# EAGLE board versmall.job (EAGLE 6.0)
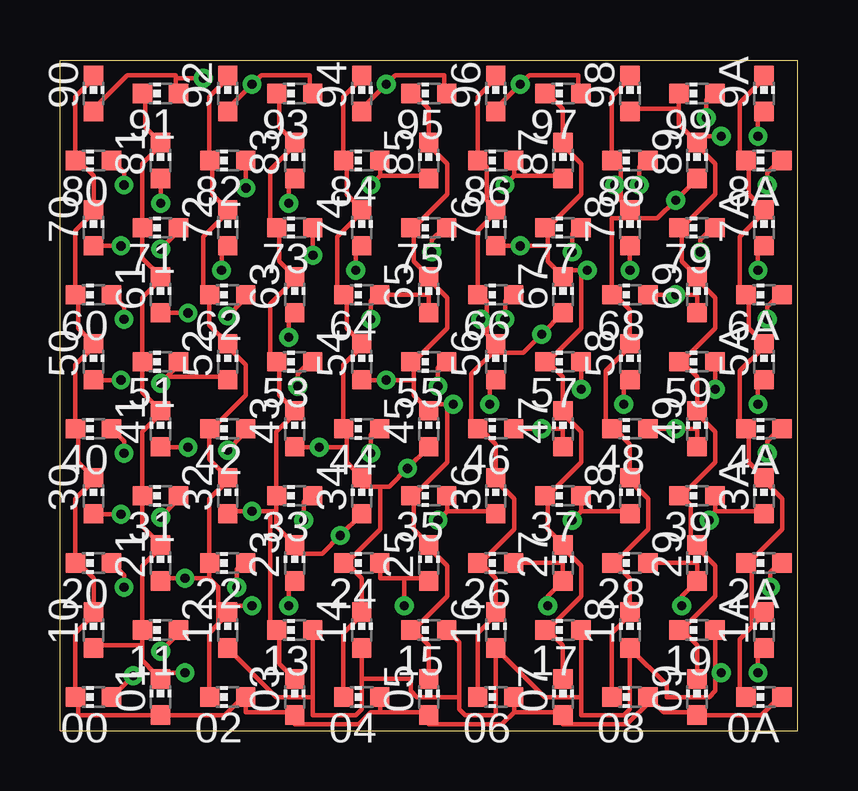
[diagram p0: board, top side]
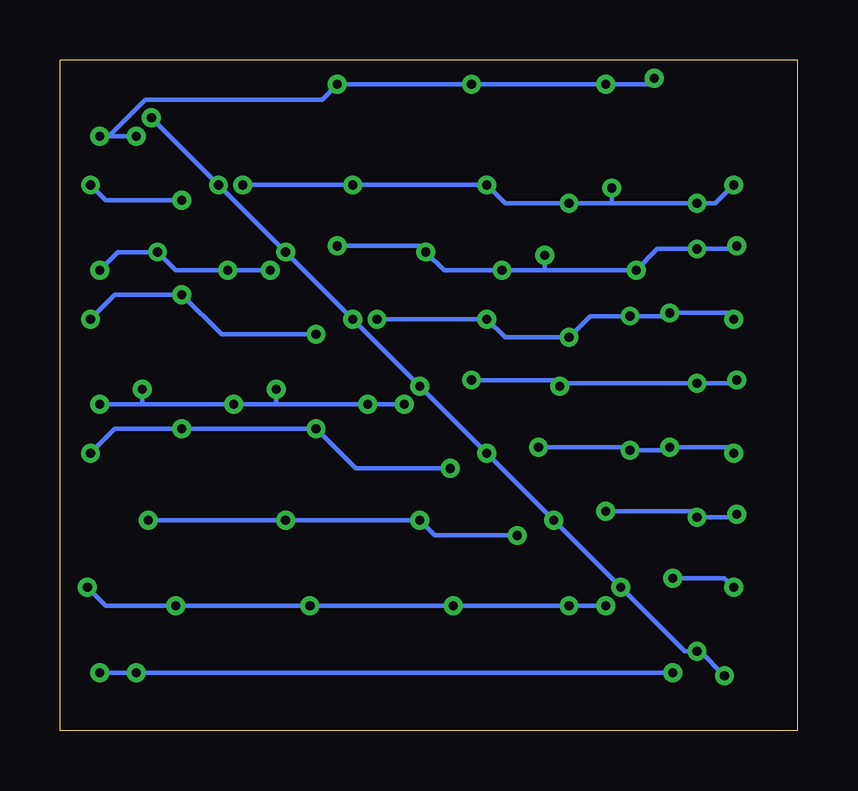
[diagram p1: board, bottom side, seen from below]

Size 30.73 x 27.94 mm. Coordinates in mm from the lower left corner, seen from the top.
Outline: 0,0 0,27.94 30.73,27.94 30.73,0 0,0
Copper layers (1*16): Top 0.035mm / dielectric 1.5mm / Bottom 0.035mm
Design rules: minimum track width 7mil, minimum drill 15mil, track to track 7mil, track to pad 7mil, pad to pad 7mil, via to via 7mil, smd to smd 7mil, copper to edge 0mil, drill to drill 7mil, minimum pad ring 10mil, minimum via ring 8mil, stop-mask expansion 4mil, vias tented up to drill 0mil, thermal gap 10mil

## Footprints (pad centres in the part's own frame; a part is rotated, then mirrored left to right if it is on the bottom)
CHIP-LED0603 = smd 0.8 x 0.8: A 0,-0.75; C 0,0.75

## Placement (x,y rotation side)
00  [CHIP-LED0603]  1.4,1.4 90 top
0A  [CHIP-LED0603]  29.34,1.4 90 top
01  [CHIP-LED0603]  4.19,1.4 0 top
1A  [CHIP-LED0603]  29.34,4.19 0 top
02  [CHIP-LED0603]  6.99,1.4 90 top
2A  [CHIP-LED0603]  29.34,6.99 90 top
03  [CHIP-LED0603]  9.78,1.4 0 top
3A  [CHIP-LED0603]  29.34,9.78 0 top
04  [CHIP-LED0603]  12.57,1.4 90 top
4A  [CHIP-LED0603]  29.34,12.57 90 top
05  [CHIP-LED0603]  15.37,1.4 0 top
5A  [CHIP-LED0603]  29.34,15.37 0 top
06  [CHIP-LED0603]  18.16,1.4 90 top
6A  [CHIP-LED0603]  29.34,18.16 90 top
07  [CHIP-LED0603]  20.95,1.4 0 top
7A  [CHIP-LED0603]  29.34,20.95 0 top
08  [CHIP-LED0603]  23.75,1.4 90 top
8A  [CHIP-LED0603]  29.34,23.75 90 top
09  [CHIP-LED0603]  26.54,1.4 0 top
9A  [CHIP-LED0603]  29.34,26.54 0 top
10  [CHIP-LED0603]  1.4,4.19 0 top
11  [CHIP-LED0603]  4.19,4.19 90 top
12  [CHIP-LED0603]  6.99,4.19 0 top
13  [CHIP-LED0603]  9.78,4.19 90 top
14  [CHIP-LED0603]  12.57,4.19 0 top
15  [CHIP-LED0603]  15.37,4.19 90 top
16  [CHIP-LED0603]  18.16,4.19 0 top
17  [CHIP-LED0603]  20.95,4.19 90 top
18  [CHIP-LED0603]  23.75,4.19 0 top
19  [CHIP-LED0603]  26.54,4.19 90 top
20  [CHIP-LED0603]  1.4,6.99 90 top
21  [CHIP-LED0603]  4.19,6.99 0 top
22  [CHIP-LED0603]  6.99,6.99 90 top
23  [CHIP-LED0603]  9.78,6.99 0 top
24  [CHIP-LED0603]  12.57,6.99 90 top
25  [CHIP-LED0603]  15.37,6.99 0 top
26  [CHIP-LED0603]  18.16,6.99 90 top
27  [CHIP-LED0603]  20.95,6.99 0 top
28  [CHIP-LED0603]  23.75,6.99 90 top
29  [CHIP-LED0603]  26.54,6.99 0 top
30  [CHIP-LED0603]  1.4,9.78 0 top
31  [CHIP-LED0603]  4.19,9.78 90 top
32  [CHIP-LED0603]  6.99,9.78 0 top
33  [CHIP-LED0603]  9.78,9.78 90 top
34  [CHIP-LED0603]  12.57,9.78 0 top
35  [CHIP-LED0603]  15.37,9.78 90 top
36  [CHIP-LED0603]  18.16,9.78 0 top
37  [CHIP-LED0603]  20.95,9.78 90 top
38  [CHIP-LED0603]  23.75,9.78 0 top
39  [CHIP-LED0603]  26.54,9.78 90 top
40  [CHIP-LED0603]  1.4,12.57 90 top
41  [CHIP-LED0603]  4.19,12.57 0 top
42  [CHIP-LED0603]  6.99,12.57 90 top
43  [CHIP-LED0603]  9.78,12.57 0 top
44  [CHIP-LED0603]  12.57,12.57 90 top
45  [CHIP-LED0603]  15.37,12.57 0 top
46  [CHIP-LED0603]  18.16,12.57 90 top
47  [CHIP-LED0603]  20.95,12.57 0 top
48  [CHIP-LED0603]  23.75,12.57 90 top
49  [CHIP-LED0603]  26.54,12.57 0 top
50  [CHIP-LED0603]  1.4,15.37 0 top
51  [CHIP-LED0603]  4.19,15.37 90 top
52  [CHIP-LED0603]  6.99,15.37 0 top
53  [CHIP-LED0603]  9.78,15.37 90 top
54  [CHIP-LED0603]  12.57,15.37 0 top
55  [CHIP-LED0603]  15.37,15.37 90 top
56  [CHIP-LED0603]  18.16,15.37 0 top
57  [CHIP-LED0603]  20.95,15.37 90 top
58  [CHIP-LED0603]  23.75,15.37 0 top
59  [CHIP-LED0603]  26.54,15.37 90 top
60  [CHIP-LED0603]  1.4,18.16 90 top
61  [CHIP-LED0603]  4.19,18.16 0 top
62  [CHIP-LED0603]  6.99,18.16 90 top
63  [CHIP-LED0603]  9.78,18.16 0 top
64  [CHIP-LED0603]  12.57,18.16 90 top
65  [CHIP-LED0603]  15.37,18.16 0 top
66  [CHIP-LED0603]  18.16,18.16 90 top
67  [CHIP-LED0603]  20.95,18.16 0 top
68  [CHIP-LED0603]  23.75,18.16 90 top
69  [CHIP-LED0603]  26.54,18.16 0 top
70  [CHIP-LED0603]  1.4,20.95 0 top
71  [CHIP-LED0603]  4.19,20.95 90 top
72  [CHIP-LED0603]  6.99,20.95 0 top
73  [CHIP-LED0603]  9.78,20.95 90 top
74  [CHIP-LED0603]  12.57,20.95 0 top
75  [CHIP-LED0603]  15.37,20.95 90 top
76  [CHIP-LED0603]  18.16,20.95 0 top
77  [CHIP-LED0603]  20.95,20.95 90 top
78  [CHIP-LED0603]  23.75,20.95 0 top
79  [CHIP-LED0603]  26.54,20.95 90 top
80  [CHIP-LED0603]  1.4,23.75 90 top
81  [CHIP-LED0603]  4.19,23.75 0 top
82  [CHIP-LED0603]  6.99,23.75 90 top
83  [CHIP-LED0603]  9.78,23.75 0 top
84  [CHIP-LED0603]  12.57,23.75 90 top
85  [CHIP-LED0603]  15.37,23.75 0 top
86  [CHIP-LED0603]  18.16,23.75 90 top
87  [CHIP-LED0603]  20.95,23.75 0 top
88  [CHIP-LED0603]  23.75,23.75 90 top
89  [CHIP-LED0603]  26.54,23.75 0 top
90  [CHIP-LED0603]  1.4,26.54 0 top
91  [CHIP-LED0603]  4.19,26.54 90 top
92  [CHIP-LED0603]  6.99,26.54 0 top
93  [CHIP-LED0603]  9.78,26.54 90 top
94  [CHIP-LED0603]  12.57,26.54 0 top
95  [CHIP-LED0603]  15.37,26.54 90 top
96  [CHIP-LED0603]  18.16,26.54 0 top
97  [CHIP-LED0603]  20.95,26.54 90 top
98  [CHIP-LED0603]  23.75,26.54 0 top
99  [CHIP-LED0603]  26.54,26.54 90 top

## Library data of the parts
00 0A 01 1A 02 2A 03 3A 04 4A 05 5A 06 6A 07 7A 08 8A 09 9A 10-99 = led

## Nets
D: 00.A 11.A 22.A 33.A 44.A 55.A 66.A 77.A 88.A 99.A
S0: 00.C 0A.A 01.A 02.A 03.A 04.A 05.A 06.A 07.A 08.A 09.A 10.C 20.C 30.C 40.C 50.C 60.C 70.C 80.C 90.C
S1: 01.C 1A.A 10.A 11.C 12.A 13.A 14.A 15.A 16.A 17.A 18.A 19.A 21.C 31.C 41.C 51.C 61.C 71.C 81.C 91.C
S2: 02.C 2A.A 12.C 20.A 21.A 22.C 23.A 24.A 25.A 26.A 27.A 28.A 29.A 32.C 42.C 52.C 62.C 72.C 82.C 92.C
S3: 03.C 3A.A 13.C 23.C 30.A 31.A 32.A 33.C 34.A 35.A 36.A 37.A 38.A 39.A 43.C 53.C 63.C 73.C 83.C 93.C
S4: 04.C 4A.A 14.C 24.C 34.C 40.A 41.A 42.A 43.A 44.C 45.A 46.A 47.A 48.A 49.A 54.C 64.C 74.C 84.C 94.C
S5: 05.C 5A.A 15.C 25.C 35.C 45.C 50.A 51.A 52.A 53.A 54.A 55.C 56.A 57.A 58.A 59.A 65.C 75.C 85.C 95.C
S6: 06.C 6A.A 16.C 26.C 36.C 46.C 56.C 60.A 61.A 62.A 63.A 64.A 65.A 66.C 67.A 68.A 69.A 76.C 86.C 96.C
S7: 07.C 7A.A 17.C 27.C 37.C 47.C 57.C 67.C 70.A 71.A 72.A 73.A 74.A 75.A 76.A 77.C 78.A 79.A 87.C 97.C
S8: 08.C 8A.A 18.C 28.C 38.C 48.C 58.C 68.C 78.C 80.A 81.A 82.A 83.A 84.A 85.A 86.A 87.A 88.C 89.A 98.C
S9: 09.C 9A.A 19.C 29.C 39.C 49.C 59.C 69.C 79.C 89.C 90.A 91.A 92.A 93.A 94.A 95.A 96.A 97.A 98.A 99.C
S10: 0A.C 1A.C 2A.C 3A.C 4A.C 5A.C 6A.C 7A.C 8A.C 9A.C

## Tracks (layer width: path | path; a pad name or v marks a point on that pad's centre or on a via)
D  (via drill 0.38)
  Top 0.178: v3.05,2.29 00.A | v4.19,3.3 4.83,3.94 4.83,4.19 11.A | v7.37,5.97 7.37,6.73 7.62,6.99 22.A | v10.16,8.76 10.16,9.53 10.41,9.78 33.A | v12.95,11.56 12.95,12.32 13.21,12.57 44.A | v15.75,14.35 15.75,15.11 16,15.37 55.A | v18.54,17.14 18.54,17.91 18.8,18.16 66.A | v21.34,19.94 21.34,20.7 21.59,20.95 77.A | v24.13,22.73 24.13,23.5 24.38,23.75 88.A | v26.92,25.53 26.92,26.29 27.18,26.54 99.A
  Bottom 0.178: v3.05,2.29 4.06,3.3 v4.19,3.3 4.7,3.3 v7.37,5.97 v10.16,8.76 v12.95,11.56 v15.75,14.35 v18.54,17.14 v21.34,19.94 v24.13,22.73 v26.92,25.53
S0
  Top 0.178: 24.64,1.27 25.15,0.76 26.54,0.76 09.A 26.54,0.64 29.21,0.64 29.97,1.4 0A.A | 24.64,1.27 08.A 24.64,1.27 | 90.C 1.4,27.18 0.64,26.42 0.64,23.75 80.C 0.76,23.75 1.4,23.11 70.C 1.4,21.59 0.64,20.83 0.64,18.16 60.C 0.76,18.16 0.76,16.76 50.C 1.4,16 0.64,15.24 0.64,12.57 40.C 0.76,12.57 0.76,11.18 1.4,10.54 30.C 1.4,10.41 0.64,9.65 0.64,6.99 20.C 0.76,6.99 1.4,6.35 10.C 1.4,4.83 0.64,4.06 0.64,1.4 00.C 0.76,1.4 0.76,0.64 4.19,0.64 | 18.92,0.76 20.95,0.76 07.A 20.95,0.25 23.62,0.25 24.64,1.27 | 18.92,0.76 18.92,1.4 06.A | 13.34,0.76 15.37,0.76 05.A 15.37,0.25 18.41,0.25 18.92,0.76 | 13.34,0.76 13.34,1.4 04.A | 4.19,0.64 6.86,0.64 7.62,1.4 02.A 7.75,0.76 9.78,0.76 03.A 9.78,0.25 12.45,0.25 12.95,0.76 13.34,0.76 | 4.19,0.64 01.A
S1  (via drill 0.38)
  Top 0.178: 10.54,1.4 9.02,1.4 6.99,3.43 12.A | 10.54,1.4 10.54,4.19 13.A | 12.57,2.16 12.57,0.89 12.32,0.64 10.54,0.64 10.54,1.4 | 12.57,2.16 14.A | 18.16,3.43 20.19,1.4 21.72,1.4 | 21.72,1.4 21.72,4.19 17.A | 23.75,3.43 23.75,0.89 23.5,0.64 21.72,0.64 21.72,1.4 | 16.64,1.4 16.64,0.89 16.89,0.64 18.16,0.64 18.16,3.43 | 16.64,1.4 16.64,3.68 15.A | 18.16,3.43 16.A | 27.3,2.41 27.3,1.65 27.05,1.4 25.27,1.4 25.27,1.91 23.75,3.43 | 27.3,2.41 27.3,4.19 19.A | 23.75,3.43 18.A | v29.08,2.41 29.08,3.17 29.34,3.43 1A.A | 27.3,2.41 v27.56,2.41 | 12.57,2.16 14.61,2.16 14.61,1.65 14.86,1.4 16.64,1.4 | 91.C 3.56,26.54 3.56,25.15 81.C 4.19,24.38 3.43,23.62 3.43,20.95 | 3.43,20.95 3.43,19.68 4.19,18.92 61.C 4.19,18.8 3.43,18.03 3.43,15.37 | 3.43,15.37 3.43,14.1 4.19,13.34 41.C 4.19,13.21 3.43,12.45 3.43,9.78 | 3.43,9.78 3.43,8.51 21.C 4.19,7.62 3.43,6.86 3.43,4.19 | 3.43,3.56 1.4,3.56 10.A | 3.43,4.19 3.43,3.56 | 3.94,2.41 3.43,2.92 3.43,3.56 | 3.94,2.41 01.C 3.94,2.41 | 3.43,4.19 11.C | 3.43,9.78 31.C | 3.43,15.37 51.C | 3.43,20.95 71.C | 3.94,2.41 v5.21,2.41
  Bottom 0.178: v29.08,2.41 v27.56,2.41 v5.21,2.41
S2  (via drill 0.38)
  Top 0.178: 6.22,18.16 6.22,16.89 52.C 6.99,16 7.75,15.24 7.75,13.97 6.35,12.57 42.C 6.22,12.57 6.22,11.3 6.99,10.54 32.C 6.99,10.41 6.22,9.65 6.22,6.99 | 92.C 6.99,27.18 6.22,26.42 6.22,23.75 82.C 6.35,23.75 6.35,22.35 6.99,21.72 72.C 6.99,21.59 5.97,20.57 5.97,18.41 6.22,18.16 | 6.22,18.16 62.C | 6.22,6.35 v5.21,6.35 4.19,6.35 21.A | 6.22,6.99 6.22,6.35 | v2.67,5.97 2.67,6.48 20.A | 6.22,6.99 22.C | 28.A 26.54,6.99 29.A 26.54,6.22 25.91,5.59 v25.91,5.21 | 26.A 20.95,6.99 27.A 20.95,6.22 20.32,5.59 v20.32,5.21 | 14.35,6.35 13.34,6.35 13.34,6.99 24.A | 14.35,6.35 15.37,6.35 25.A | 6.6,4.45 6.99,4.83 12.C 6.99,5.21 v8,5.21 | 6.6,4.45 6.22,4.06 6.22,1.4 02.C | v9.53,5.21 9.53,5.97 9.78,6.22 23.A | v29.59,5.97 29.59,6.6 29.97,6.99 2A.A | v14.35,5.21 14.35,6.35 | 6.22,6.35 6.6,5.97 6.6,4.45
  Bottom 0.178: v2.67,5.97 3.05,6.35 v5.21,6.35 | v8,5.21 v9.53,5.21 v14.35,5.21 v20.32,5.21 v25.91,5.21 28.83,5.21 v29.59,5.97
S3  (via drill 0.38)
  Top 0.178: v2.54,9.02 1.4,9.02 30.A | v4.19,8.89 4.83,9.53 4.83,9.78 31.A | 93.C 9.14,26.54 9.14,25.15 83.C 9.78,24.38 8.76,23.37 8.76,21.21 9.02,20.95 73.C 9.14,20.95 9.14,19.56 9.78,18.92 63.C 9.78,18.8 8.76,17.78 8.76,15.62 9.02,15.37 53.C 9.14,15.37 9.14,13.97 9.78,13.34 43.C 9.78,13.21 9.02,12.45 9.02,9.78 | 27.3,9.14 29.34,9.14 3A.A | 27.3,9.14 27.3,9.78 39.A | 21.72,9.14 23.75,9.14 38.A | 21.72,9.14 21.72,9.78 37.A | 16.13,9.14 18.16,9.14 36.A | 16.13,9.14 35.A | 03.C 9.14,2.79 9.14,4.19 13.C 9.02,4.19 8.76,4.45 8.76,9.14 | 9.02,9.14 8.76,9.14 | 8.76,9.14 v8,9.14 6.99,9.14 32.A | 9.02,9.78 9.02,9.14 | 9.02,9.14 9.02,8.51 23.C 9.78,7.37 10.92,7.37 v11.68,8.13 12.57,9.02 34.A | v15.75,8.76 16.13,9.14 | v21.34,8.76 21.72,9.14 | 27.3,9.14 27.05,8.89 v27.05,8.76 | 9.02,9.78 33.C
  Bottom 0.178: v2.54,9.02 2.67,8.89 v4.19,8.89 4.45,9.14 v8,9.14 | v11.68,8.13 15.11,8.13 v15.75,8.76 v21.34,8.76 v27.05,8.76
S4  (via drill 0.38)
  Top 0.178: 46.A v20.07,12.57 20.95,12.57 47.A | 48.A v25.65,12.57 26.54,12.57 49.A | v29.46,11.56 29.46,12.06 29.97,12.57 4A.A | v5.33,11.81 41.A | v6.99,11.68 7.62,12.32 7.62,12.57 42.A | v2.67,11.56 2.67,12.06 40.A | 94.C 12.57,27.18 11.81,26.42 84.C 11.94,23.75 11.94,22.35 12.57,21.72 74.C 12.57,21.59 11.56,20.57 11.56,18.41 64.C 11.94,18.16 11.94,16.76 54.C 12.57,16 11.81,15.24 44.C 11.94,12.57 11.94,11.81 | 04.C 11.81,4.06 12.57,4.83 14.C 12.57,6.35 11.94,6.99 | 11.94,11.81 11.94,11.18 12.57,10.54 34.C 12.57,10.16 13.34,10.16 | 11.94,11.81 v10.79,11.81 43.A | 13.34,10.16 13.72,10.16 v14.48,10.92 45.A | 11.94,6.99 13.34,8.38 13.34,10.16 | 11.94,6.99 24.C
  Bottom 0.178: v29.46,11.56 28.45,12.57 v25.65,12.57 v20.07,12.57 18.41,10.92 v14.48,10.92 | v2.67,11.56 2.92,11.81 v5.33,11.81 5.46,11.68 v6.99,11.68 7.11,11.81 v10.79,11.81
S5  (via drill 0.38)
  Top 0.178: v2.54,14.61 1.4,14.61 50.A | 4.45,14.73 4.83,15.11 4.83,15.37 51.A | 4.45,14.73 6.99,14.73 52.A | 4.45,14.73 v4.19,14.48 | v9.91,14.35 9.91,14.86 10.41,15.37 53.A | 14.73,20.95 14.73,19.56 15.37,18.92 65.C 15.37,18.8 16.13,18.03 16.13,16.76 14.73,15.37 | 95.C 14.73,26.54 15.37,25.91 85.C 15.37,24.38 16.13,23.62 16.13,22.35 14.73,20.95 | 14.73,20.95 75.C | 14.73,4.19 15.37,3.56 05.C | 14.73,9.78 14.73,8.38 25.C 15.37,7.62 16.13,6.86 16.13,5.59 14.73,4.19 | 14.73,4.19 15.C | 15.11,13.59 14.73,13.97 14.73,14.61 | 15.11,13.59 15.37,13.34 45.C 15.11,13.59 | 14.73,15.37 14.73,14.61 | 14.73,14.61 v13.59,14.61 12.57,14.61 54.A | v17.91,13.59 17.91,14.35 18.16,14.61 56.A | 15.11,13.59 16.13,13.59 | v23.5,13.59 23.5,14.35 23.75,14.61 58.A | v21.72,14.22 21.72,15.37 57.A | v29.08,13.59 29.08,14.35 29.34,14.61 5A.A | v27.3,14.22 27.3,15.37 59.A | 14.73,9.78 16.13,11.18 16.13,13.59 | 14.73,9.78 35.C | 16.13,13.59 v16.38,13.59 | 14.73,15.37 55.C
  Bottom 0.178: v2.54,14.61 2.67,14.48 v4.19,14.48 9.78,14.48 v9.91,14.35 10.16,14.61 v13.59,14.61 | v16.38,13.59 v17.91,13.59 21.72,13.59 | 21.72,13.59 v23.5,13.59 27.3,13.59 | 21.72,13.59 v21.72,14.22 | 27.3,13.59 v29.08,13.59 | 27.3,13.59 v27.3,14.22
S6  (via drill 0.38)
  Top 0.178: 65.A 15.37,18.16 64.A 13.21,18.16 12.95,17.91 v12.95,17.14 | v5.33,17.4 61.A | v6.99,17.27 7.62,17.91 7.62,18.16 62.A | v2.67,17.14 2.67,17.65 60.A | v9.53,16.38 9.53,17.14 63.A | 68.A v25.65,18.16 26.54,18.16 69.A | v29.46,17.14 29.46,17.65 29.97,18.16 6A.A | 96.C 18.16,27.18 17.4,26.42 86.C 17.53,23.75 17.78,23.5 17.78,22.1 18.16,21.72 76.C 18.16,21.59 17.4,20.83 66.C 17.53,18.16 17.78,17.91 17.78,17.14 | 06.C 17.4,4.06 18.16,4.83 16.C 18.16,6.35 17.53,6.99 | 17.78,17.14 17.78,16.51 56.C | 56.C 18.16,15.88 | 18.16,15.88 18.16,15.75 19.3,15.75 v20.07,16.51 67.A | 18.16,15.88 17.14,14.86 17.14,12.83 46.C 17.53,12.57 18.16,11.94 36.C 18.16,10.41 18.92,9.65 18.92,8.38 17.53,6.99 | 18.16,16 56.C | 17.53,6.99 26.C | 17.78,17.14 v17.53,17.14
  Bottom 0.178: v2.67,17.14 2.92,17.4 v5.33,17.4 5.46,17.27 v6.99,17.27 8.64,17.27 v9.53,16.38 12.19,16.38 v12.95,17.14 v17.53,17.14 | v29.46,17.14 28.45,18.16 v25.65,18.16 24,16.51 v20.07,16.51
S7  (via drill 0.38)
  Top 0.178: v2.54,20.19 70.A | v4.19,20.07 4.83,20.7 4.83,20.95 71.A | v6.73,19.18 6.73,19.94 72.A | v12.32,19.18 12.32,19.94 74.A | v10.54,19.81 10.54,20.95 73.A | v15.49,19.94 15.49,20.45 16,20.95 75.A | 20.32,4.19 20.95,3.56 07.C | 20.32,9.78 20.32,8.38 27.C 20.95,7.62 21.72,6.86 21.72,5.59 20.32,4.19 | 20.32,4.19 17.C | 97.C 20.32,26.54 20.95,25.91 87.C 20.95,24.38 21.72,23.62 21.72,22.35 20.32,20.95 | 20.32,15.37 20.95,14.73 47.C 20.95,13.21 21.72,12.45 21.72,11.18 20.32,9.78 | 20.7,19.18 20.32,19.56 20.32,20.19 | 20.7,19.18 20.95,18.92 67.C 20.7,19.18 | 20.32,20.95 20.32,20.19 | 20.32,20.19 v19.18,20.19 76.A | v23.75,19.18 78.A | 20.7,19.18 21.72,19.18 | v26.67,19.94 26.67,20.45 27.18,20.95 79.A | v29.08,19.18 29.08,19.94 7A.A | 20.32,15.37 21.72,16.76 21.72,19.18 | 20.32,15.37 57.C | 21.72,19.18 v21.97,19.18 | 20.32,20.95 77.C | 20.32,9.78 37.C
  Bottom 0.178: v2.54,20.19 2.67,20.07 v4.19,20.07 5.84,20.07 v6.73,19.18 10.54,19.18 | 10.54,19.18 v12.32,19.18 14.73,19.18 v15.49,19.94 15.75,20.19 v19.18,20.19 | 10.54,19.18 v10.54,19.81 | v21.97,19.18 v23.75,19.18 25.91,19.18 v26.67,19.94 28.32,19.94 v29.08,19.18
S8  (via drill 0.38)
  Top 0.178: 18.92,23.11 20.95,23.11 87.A | 18.92,23.11 18.92,23.75 86.A | 13.34,23.11 15.37,23.11 85.A | 13.34,23.11 13.34,23.75 84.A | v2.67,22.73 2.67,23.24 80.A | 81.A v4.19,21.97 | v9.53,21.97 9.53,22.73 9.78,22.99 83.A | v7.75,22.61 82.A | v12.95,22.73 13.34,23.11 | v18.54,22.73 18.92,23.11 | 23.37,22.73 23.37,22.1 23.75,21.72 78.C | 23.37,22.73 23.37,23.5 23.11,23.75 88.C 22.99,23.75 22.99,26.42 23.75,27.18 98.C | 23.75,21.34 24.89,21.34 v25.65,22.1 26.54,22.99 89.A | 78.C 23.75,21.34 | v29.46,22.73 29.46,23.24 29.97,23.75 8A.A | 08.C 22.99,1.4 22.99,4.06 23.75,4.83 18.C 23.75,6.35 23.11,6.99 | 23.11,6.99 24.51,8.38 24.51,9.65 23.75,10.41 38.C 23.75,11.94 23.11,12.57 48.C 22.99,12.57 22.73,12.83 22.73,14.99 23.75,16 58.C 23.75,17.53 23.11,18.16 68.C 22.99,18.16 22.99,21.34 23.75,21.34 | 23.11,6.99 28.C | 23.75,21.59 78.C | 23.37,22.73 v23.11,22.73
  Bottom 0.178: v2.67,22.73 3.43,21.97 v4.19,21.97 7.75,21.97 | 7.75,21.97 v9.53,21.97 12.19,21.97 v12.95,22.73 v18.54,22.73 v23.11,22.73 | 7.75,21.97 v7.75,22.61 | v29.46,22.73 28.83,22.1 v25.65,22.1
S9  (via drill 0.38)
  Top 0.178: 96.A 18.16,25.91 v19.18,26.92 19.56,27.3 21.59,27.3 21.59,26.54 97.A | 94.A 12.57,25.91 v13.59,26.92 13.97,27.3 16,27.3 16,26.54 95.A | 4.83,27.18 4.83,26.54 91.A | 4.83,27.18 4.83,27.3 2.79,27.3 1.4,25.91 90.A | 92.A 6.99,25.91 v8,26.92 8.38,27.3 10.41,27.3 10.41,26.54 93.A | v5.97,27.18 4.83,27.18 | 25.91,4.19 26.54,3.56 09.C | 25.91,9.78 26.29,9.4 26.29,8 29.C 26.54,7.62 27.3,6.86 27.3,5.59 25.91,4.19 | 25.91,4.19 19.C | 25.78,25.91 23.75,25.91 98.A | 25.78,25.91 99.C | 26.29,24.77 25.78,25.27 25.78,25.91 | 26.29,24.77 89.C | v29.08,24.77 29.08,25.53 9A.A | 26.29,24.77 v27.56,24.77 | 26.29,24.77 89.C | 25.91,15.37 26.54,14.73 49.C 26.54,13.21 27.3,12.45 27.3,11.18 25.91,9.78 | 25.91,20.95 25.91,19.56 26.54,18.92 69.C 26.54,18.8 27.3,18.03 27.3,16.76 25.91,15.37 | 25.91,15.37 59.C | 25.91,20.95 27.3,22.35 27.3,23.62 26.54,24.38 89.C | 25.91,20.95 79.C | 25.91,9.78 39.C
  Bottom 0.178: v5.97,27.18 6.22,26.92 v8,26.92 v13.59,26.92 v19.18,26.92 19.81,26.29 27.18,26.29 28.7,24.77 | v27.56,24.77 28.7,24.77 | 28.7,24.77 v29.08,24.77
S10
  Top 0.178: 9A.C 29.34,27.18 28.32,26.16 28.32,24 28.57,23.75 8A.C 28.7,23.75 28.7,22.35 29.34,21.72 7A.C 29.34,21.59 28.32,20.57 28.32,18.41 28.57,18.16 6A.C 28.7,18.16 28.7,16.76 5A.C 29.34,16 28.32,14.99 28.32,12.83 28.57,12.57 4A.C 28.7,12.57 28.7,11.18 29.34,10.54 3A.C 29.34,10.41 30.1,9.65 30.1,8.38 28.7,6.99 | 28.83,4.32 29.34,4.83 1A.C | 28.83,4.32 28.32,3.81 28.32,1.65 28.57,1.4 0A.C | 28.7,6.99 28.83,6.86 28.83,4.32 | 28.7,6.99 2A.C